# Altium PCB PCB1.PcbDoc
Units mil, origin at the board's own origin, x right, y up, seen from the top; angles counter-clockwise.
Board outline 3295 x 4000 mil, 4 copper layers (Top Layer, GND Plane, Power Plane, Bottom Layer), stack 23.756 mil thick; 49 components, 26 nets, 223 pads, 93 vias.
Unrouted connection lines stored in the file: 37.
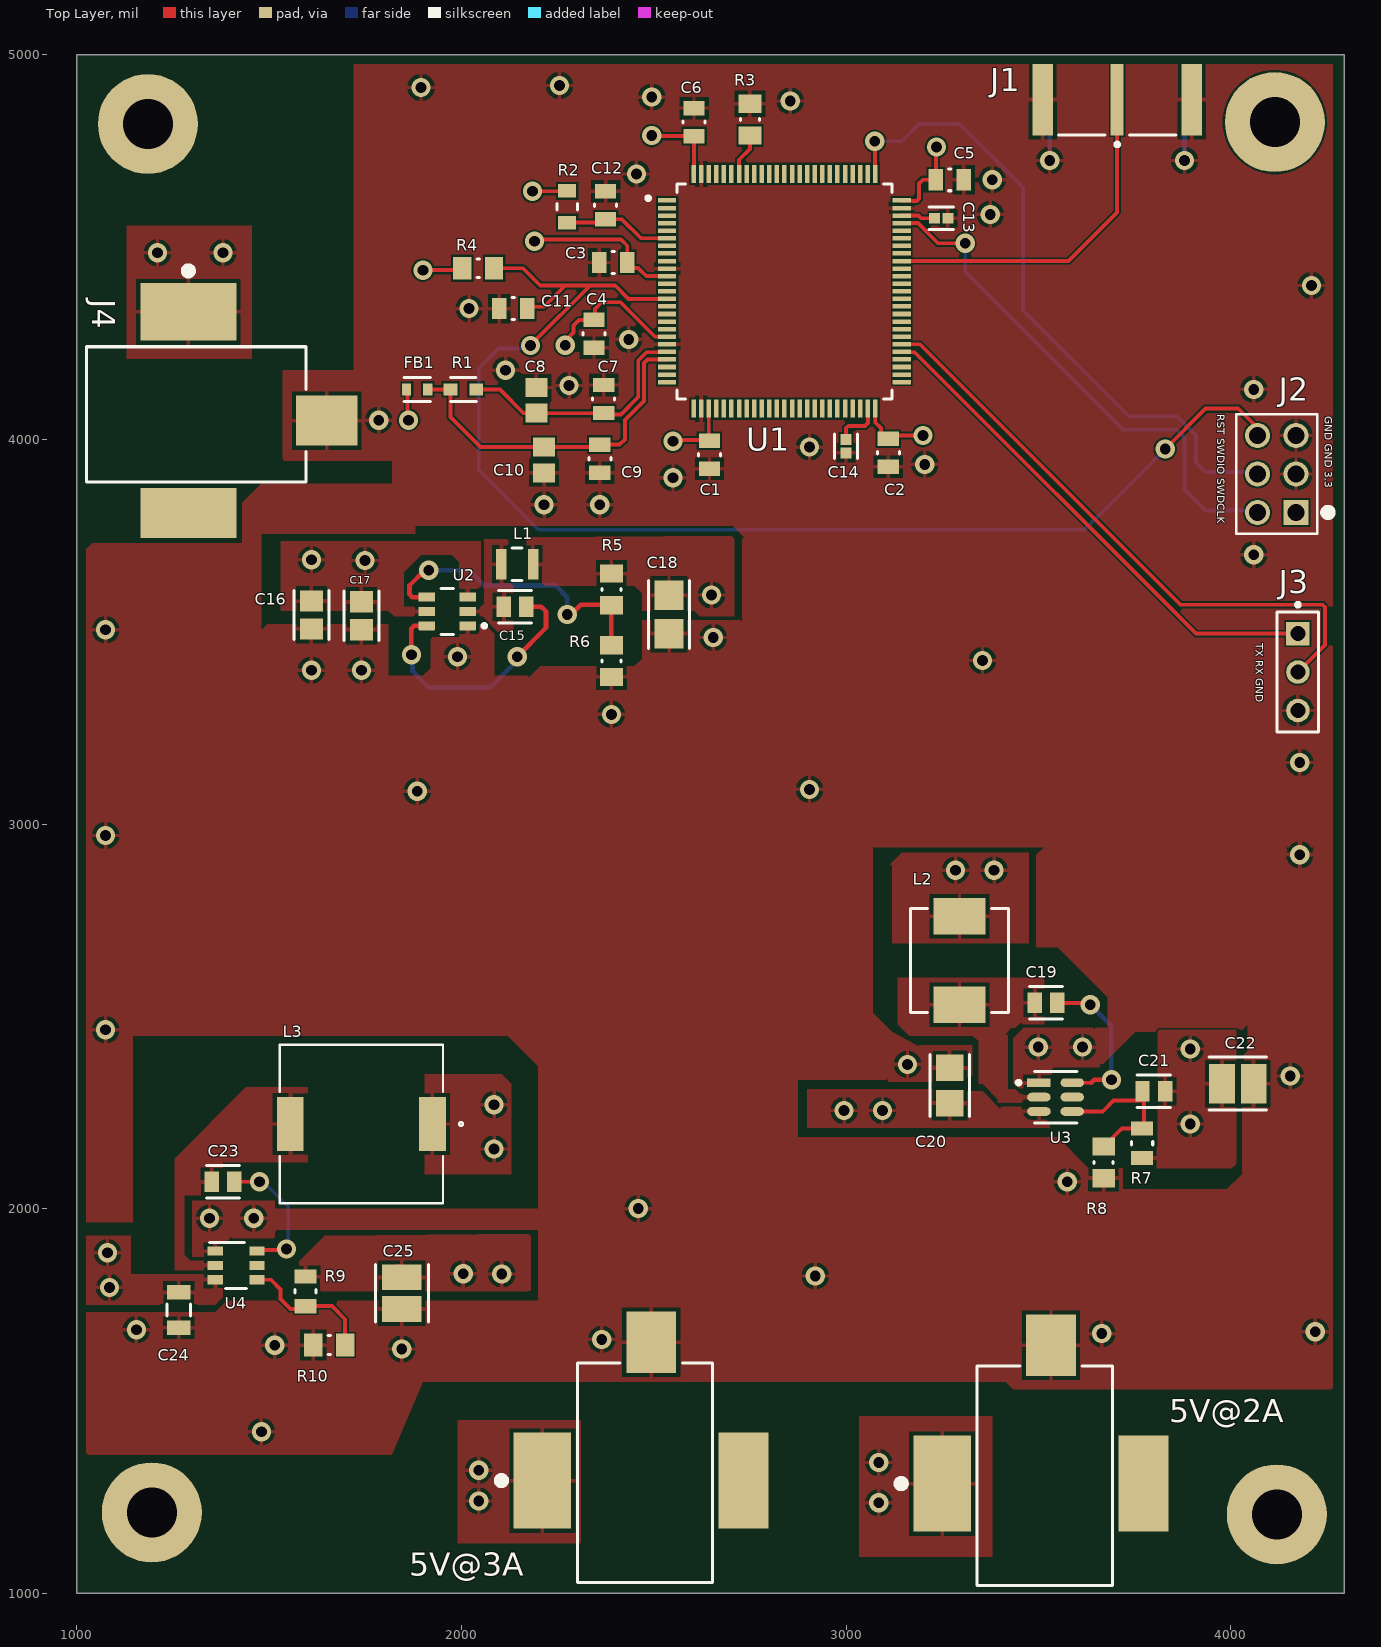
[diagram p0: Top Layer view]
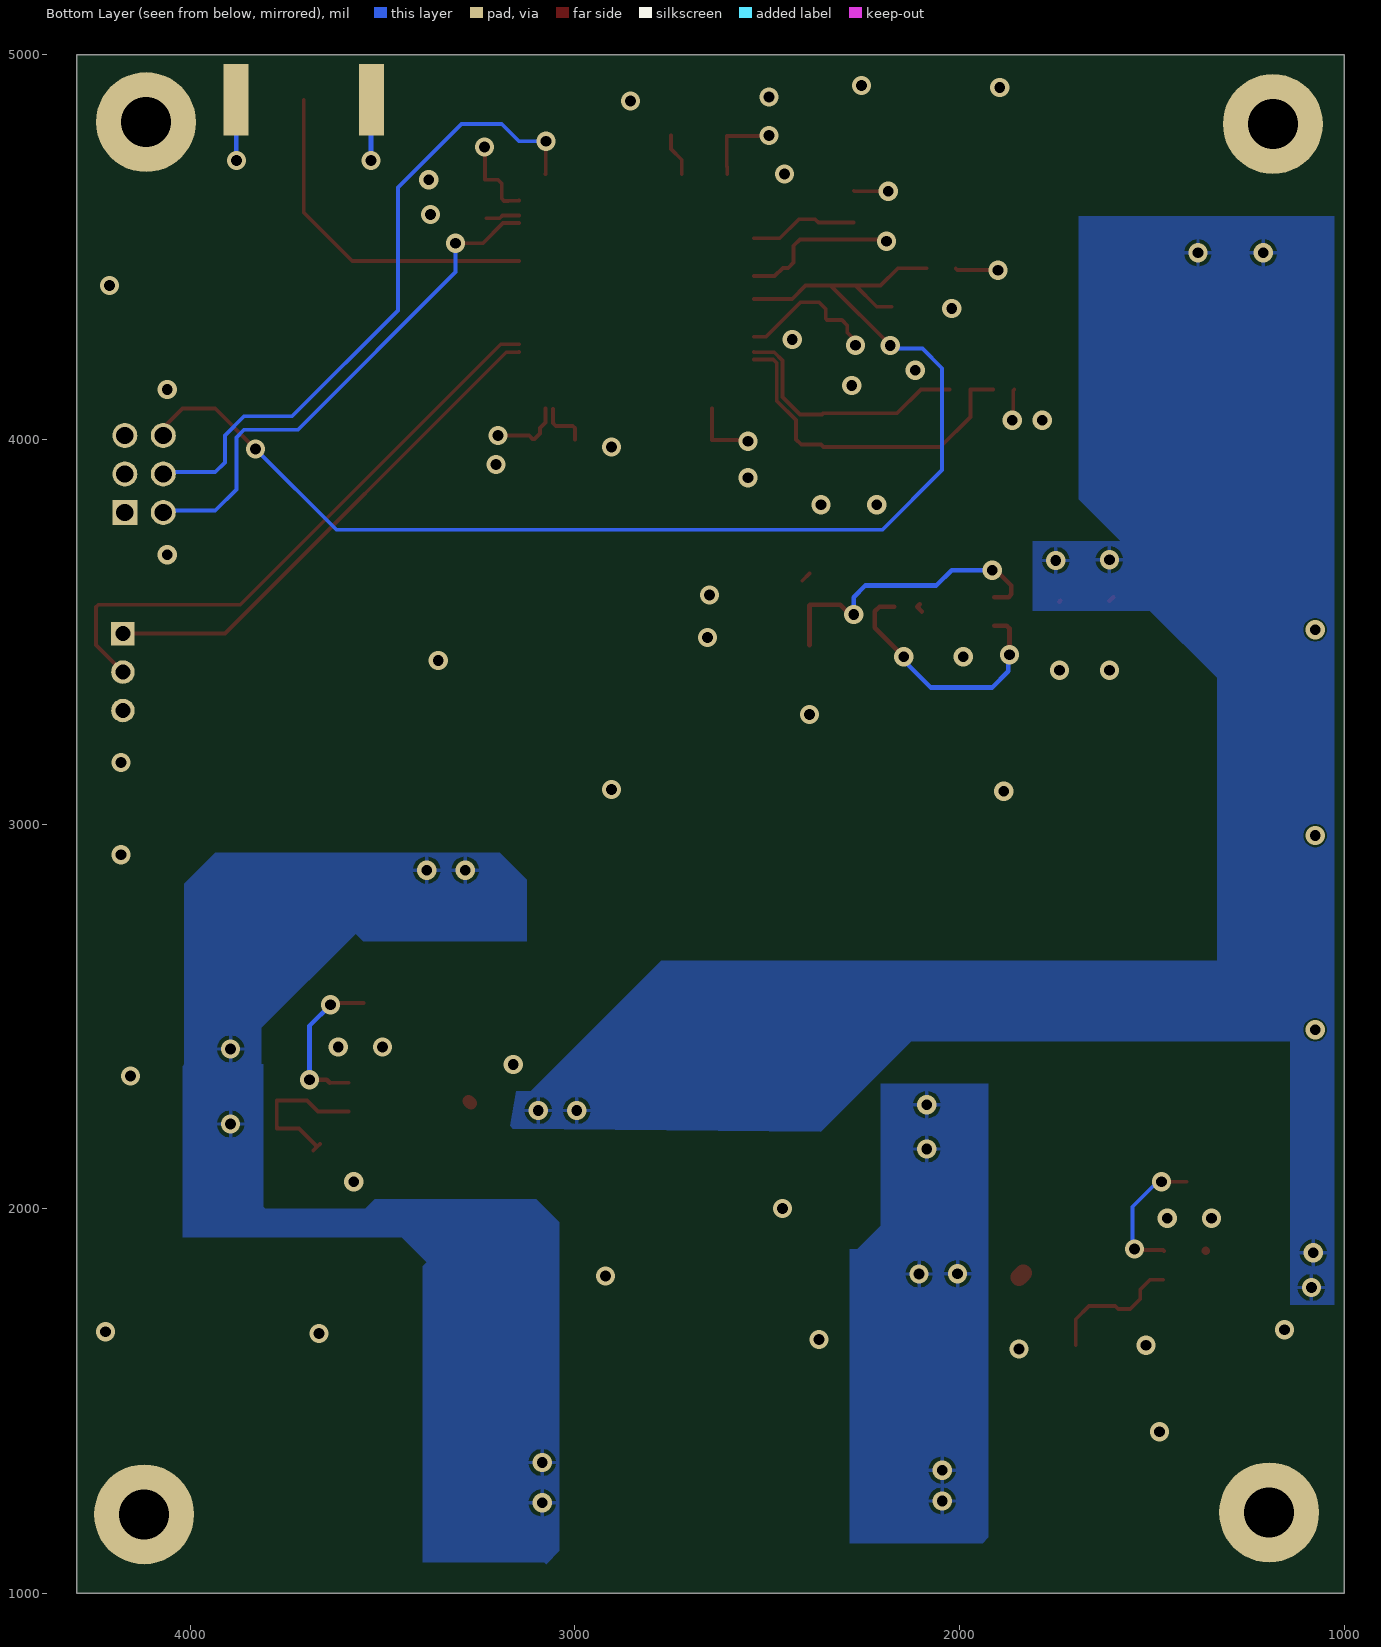
[diagram p1: Bottom Layer view, seen from below]
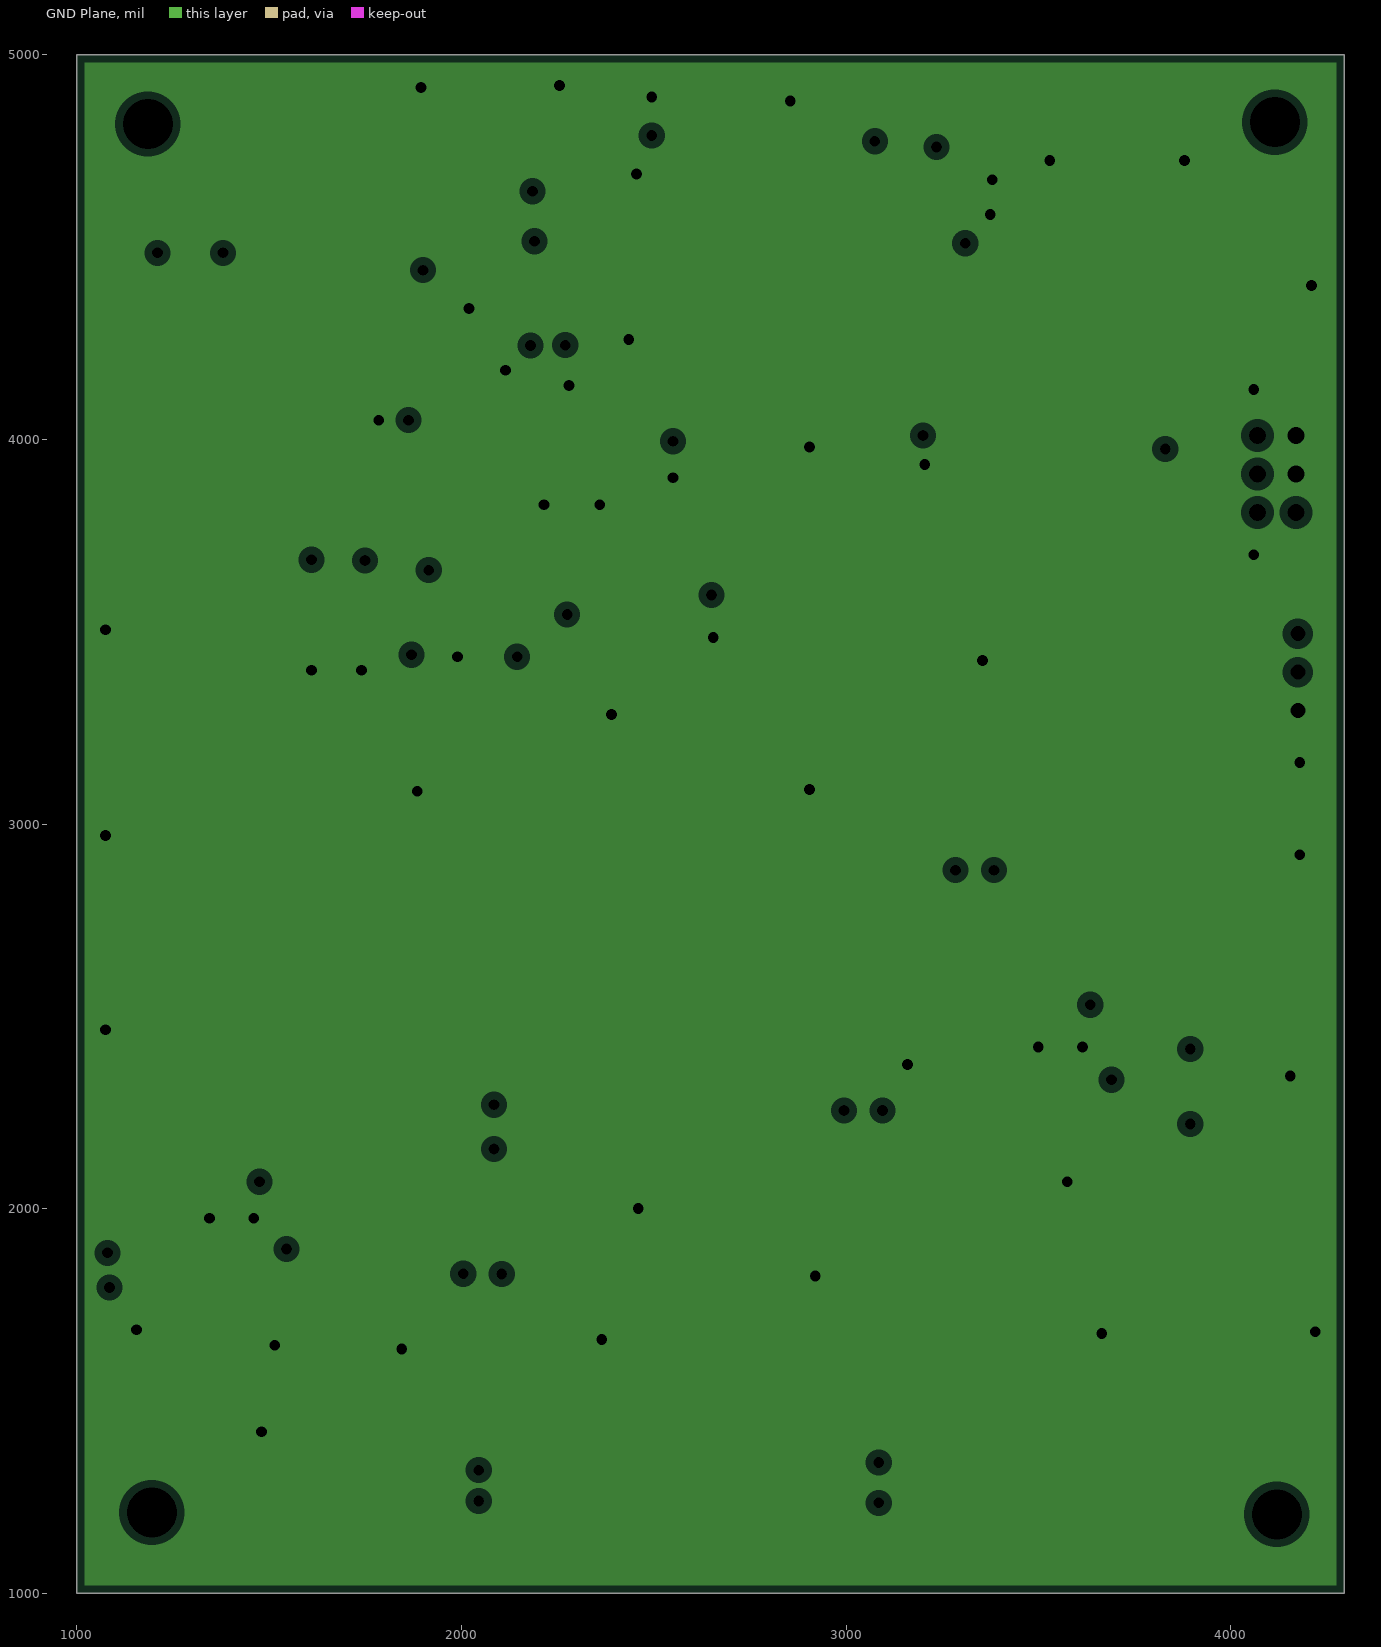
[diagram p2: GND Plane, clearances drawn from the general rule]
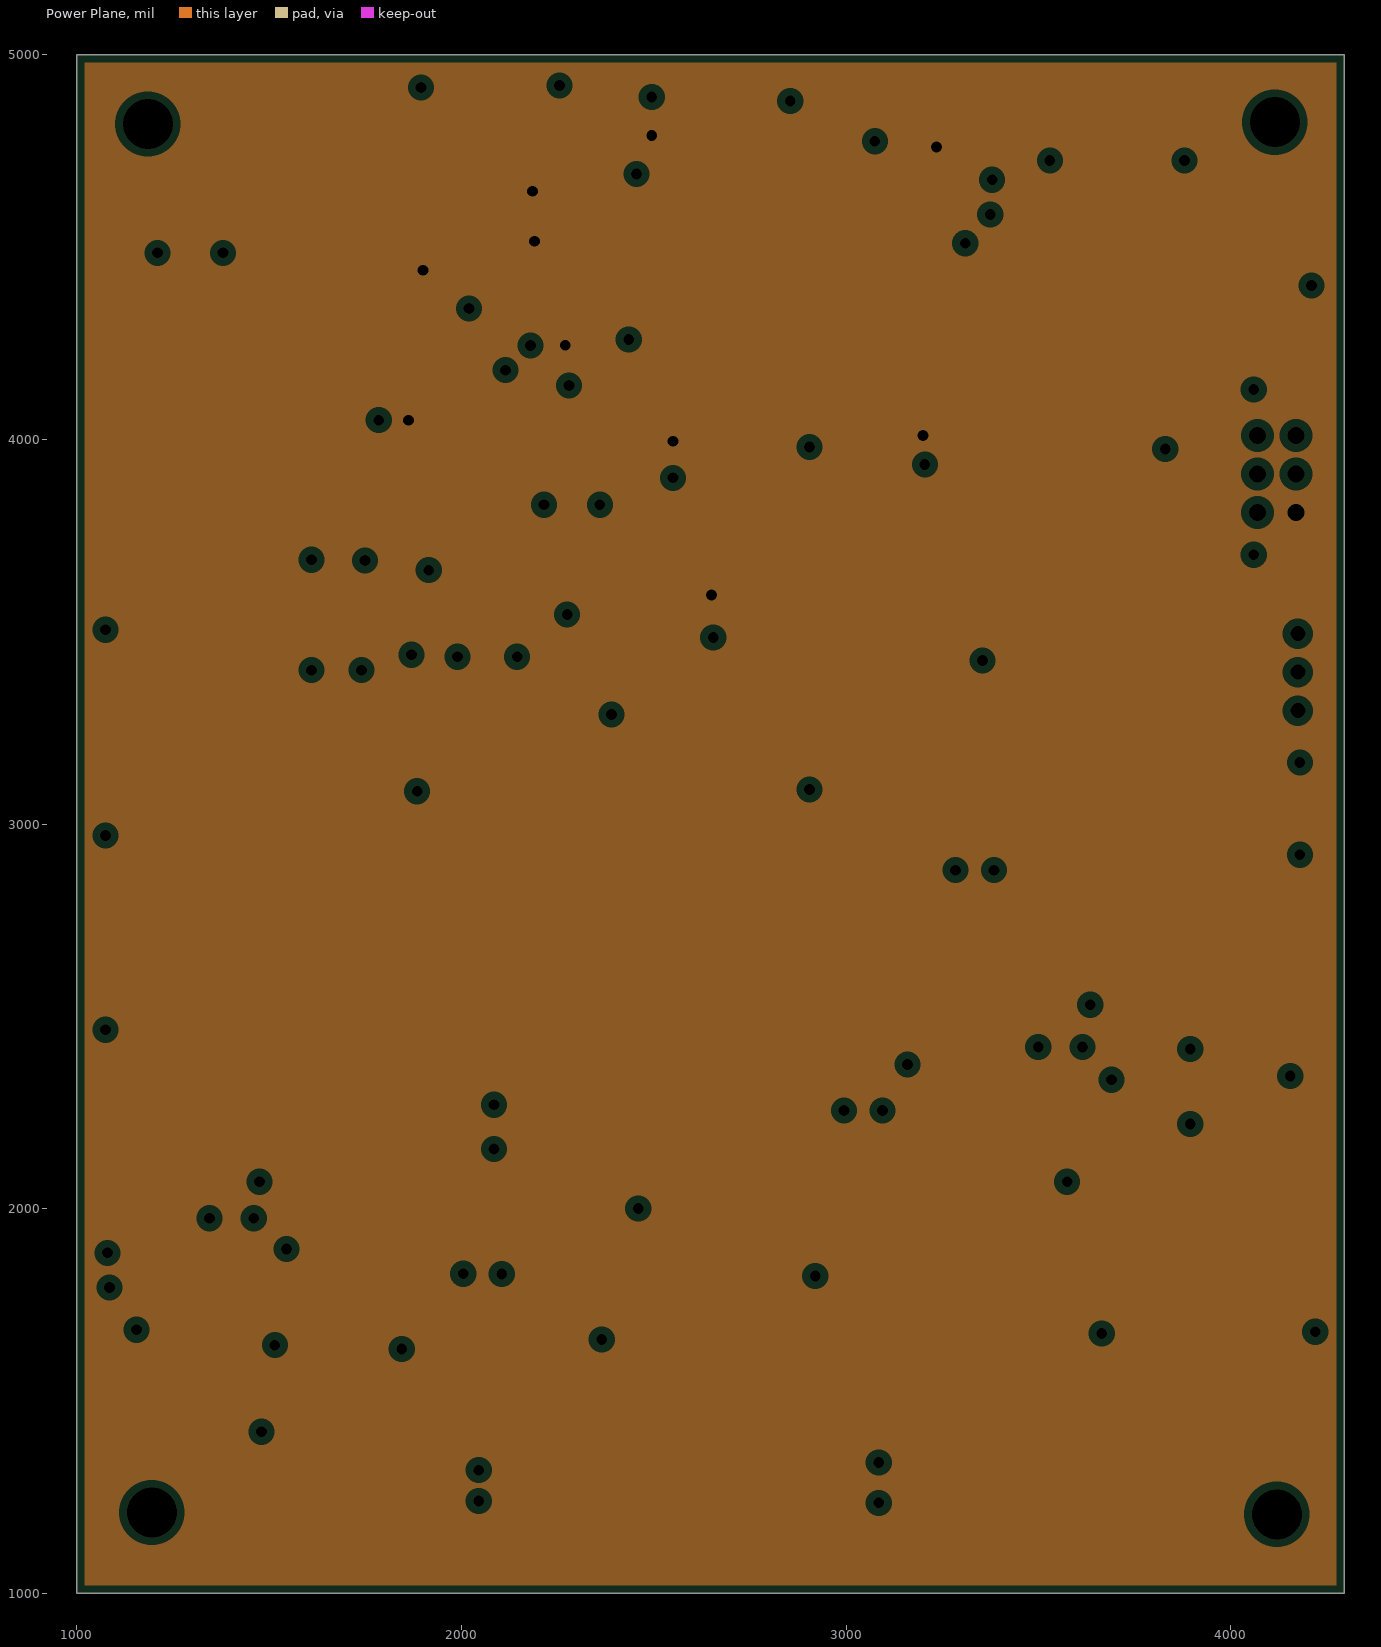
[diagram p3: Power Plane, clearances drawn from the general rule]
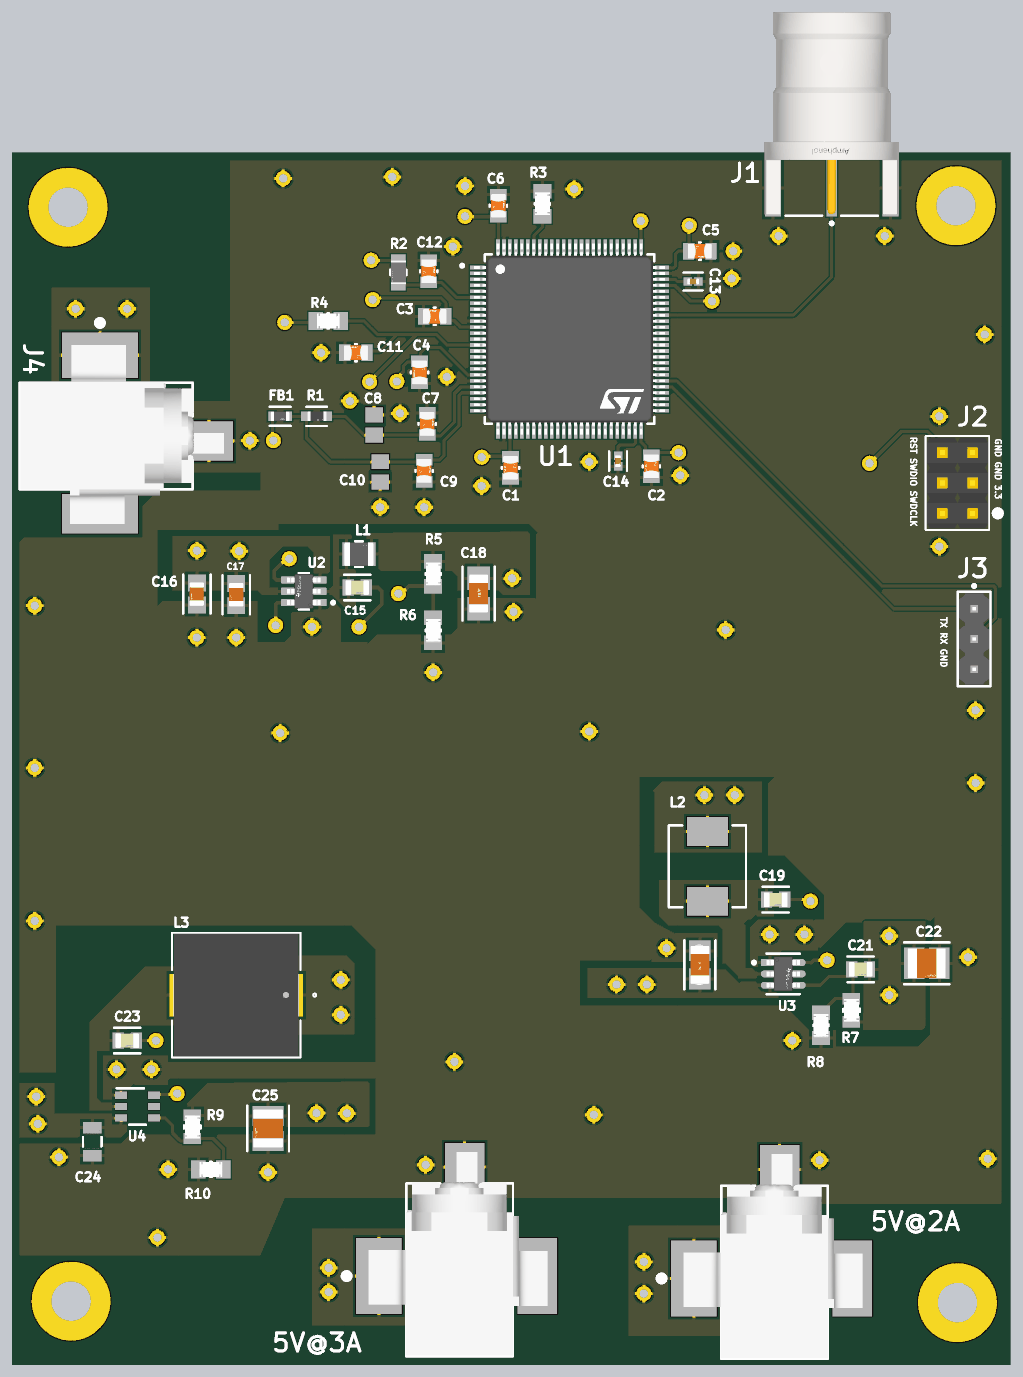
[diagram p4: 3D render of the assembled board from above, using the file's embedded part models]

## Layer stack, top to bottom
Top Solder: solder mask 0.4, Solder Resist, Dk 3.5
Top Layer: signal copper 1.4
Dielectric 2: prepreg 2.8, PP-006, Dk 4.1
GND Plane: plane copper 1.378, net GND
Dielectric 1: dielectric 12.6, FR-4, Dk 4.8
Power Plane: plane copper 1.378, net 3.3V
Dielectric 3: prepreg 2.8, PP-006, Dk 4.1
Bottom Layer: signal copper 1.4
Bottom Solder: solder mask 0.4, Solder Resist, Dk 3.5

## Board outline
1000,1000 4295,1000 4295,5000 1000,5000

## Design rules (kind name [scope] priority, off if disabled: settings)
Clearance [All] p1: gap=5 ignorepadtopadclearanceinfootprint=FALSE
HoleSize [All] p1: absolutevalues=TRUE maxlimit=150 minlimit=1 maxpercent=80.000 minpercent=20.000
MinimumSolderMaskSliver [All] p1: minsoldermaskwidth=5
PlaneClearance [All] p1: clearance=20
PlaneConnect [All] p1: planeconnectstyle=Relief reliefexpansion=20 reliefentries=4 reliefconductorwidth=10 reliefairgap=10
PolygonConnect PolygonConnect_1 [All] p1: connectstyle=Relief reliefconductorwidth=10 reliefentries=4 polygonreliefangle="90 Angle" airgapwidth=10
PolygonConnect [IsPad AND InComponent('L3') vs InNet('NetC23_2')] p2: connectstyle=Direct reliefconductorwidth=10 reliefentries=4 polygonreliefangle="90 Angle" airgapwidth=10
RoutingVias [All] p1: holewidth=28 width=50 viastyle="Through Hole" minholewidth=28 minwidth=50 maxholewidth=28 maxwidth=50
SilkToSolderMaskClearance [IsPad] p1: minsilkscreentomaskgap=6.5 clearancetoexposedcopper=TRUE
SolderMaskExpansion [All] p1: expansion=4 istentingtop=FALSE
SupplyNets "Schematic Supply Nets_1" [InNet('GND')] p1: voltage=0.000
Width [All] p1: maxlimit=50 minlimit=10 preferedwidth=32 bottomlayer_maxwidth=40 minimp=50.000000 maximp=50.000000 favimp=50.000000
25 further rules are at their usual default settings.

## Components (designator, comment, footprint, x,y, rotation, side; value= is the part's Value field where it differs from the comment)
5V@2A "RASM722X" SWIT-RASM722X_V 3511.61,1464.92 r0 top (schematic designator J5)
5V@3A "RASM722X" SWIT-RASM722X_V 2472.21,1472.75 r0 top (schematic designator J6)
C1 "CC0805KRX7R9BB104" FP-CC0805-0_85-MFG 2645,3960 r270 top value="100 nF"
C2 "CC0805KRX7R9BB104" FP-CC0805-0_85-MFG 3110,3965 r270 top value="100 nF"
C3 "CC0805KRX7R9BB104" FP-CC0805-0_85-MFG 2395,4460 r180 top value="100 nF"
C4 "CC0805KRX7R9BB104" FP-CC0805-0_85-MFG 2345,4275 r270 top value="100 nF"
C5 "CC0805KRX7R9BB104" FP-CC0805-0_85-MFG 3270,4675 r0 top value="100 nF"
C6 "CC0805KRX7R9BB104" FP-CC0805-0_85-MFG 2605,4825 r90 top value="100 nF"
C7 "100nF" FP-CC0805-0_85-MFG 2370,4105 r90 top value="100 nF"
C8 "1uF" CAPC2013X140X45NL15T25 2195,4101.54 r90 top
C9 "100nF" FP-CC0805-0_85-MFG 2360,3950 r90 top value="100 nF"
C10 "1uF" CAPC2013X140X45NL15T25 2215,3946.54 r90 top
C11 "CC0805KRX7R9BB104" FP-CC0805-0_85-MFG 2135,4340 r180 top value="100 nF"
C12 "1uF" FP-CC0805-0_85-MFG 2375,4608.58 r90 top value="1 uF"
C13 "2.2uF" FP-GRM155-0_2-IPC_B 3247.72,4575 r0 top
C14 "2.2uF" FP-GRM155-0_2-IPC_B 3000,3982.28 r270 top
C15 "C0805C104M5RACTU" FP-C0805C-DN-MFG 2139.53,3565 r180 top value="0.10 μF"
C16 "GRM21BR61E106MA73L" FP-GRM21B-0_15-IPC_A 1610,3543.53 r270 top
C17 "GRM21BR61E106MA73L" FP-GRM21B-0_15-IPC_A 1740,3541.47 r270 top
C18 "C3216X7S0J476M160AC" FP-C3216-160-0_2-IPC_A 2540,3545 r270 top
C19 "C0805C104M5RACTU" FP-C0805C-DN-MFG 3520,2535 r180 top value="0.10 μF"
C20 "22 uF" FP-C3216-160-0_2-IPC_B 3270,2320 r90 top
C21 "C0805C680J5GACTU" FP-C0805C-DN-MFG 3800.47,2305 r180 top value="68 pF"
C22 "GRM32ER61C476KE15L" FP-GRM32E-0_3-0_2-IPC_C 4018.64,2325 r0 top
C23 "C0805C104M5RACTU" FP-C0805C-DN-MFG 1380,2070 r180 top value="0.10 μF"
C24 "CGA4J3X5R1C475K125AB" FP-CGA4J-IPC_A 1265,1736.26 r270 top
C25 "GRM32ER61C476KE15L" FP-GRM32E-0_3-0_2-IPC_C 1845,1780 r270 top
FB1 "470" FP-MPZ1608-0_8-MFG 1885,4130 r0 top
J1 "112640" FP-112640-MFG 3705,5130 r180 top
J2 "TSW-103-07-L-D" TSW-103-07-G-D_SAI 4170,3810 r90 top
J3 "PREC003SAAN-RC" FP-PREC003SAAN-RC-MFG 4175,3395 r270 top
J4 "RASM722X" SWIT-RASM722X_V 1470,4070 r270 top
L1 "MLP2520V3R3MT0S1" FP-MLP2520M-MFG 2145,3675 r0 top
L2 "IHLP2525CZER100M01" VISH-IHLP2525C-01_V 3295,2645 r90 top
L3 "10 uH" IND_MSS1048_COC 1740,2220 r180 top
R1 "47" FP-RT0603-MFG 2005,4130 r0 top value=47Ω
R2 "0" FP-AC0805-0_6-MFG 2275,4605 r270 top
R3 "10k" FP-CRCW0805-e3-IPC_A 2750,4831.37 r90 top
R4 "10k" FP-CRCW0805-e3-IPC_A 2043.63,4445 r180 top
R5 "CRCW080533K2FKEA" FP-CRCW0805-e3-IPC_A 2390,3610 r270 top
R6 "CRCW080510K0FKEA" FP-CRCW0805-e3-IPC_A 2390,3423.63 r270 top
R7 "CRCW0805100KFKEA" FP-CRCW0805-e3-MFG 3770,2170 r90 top
R8 "CRCW080513K7FKEA" FP-CRCW0805-e3-IPC_A 3670,2120 r270 top
R9 "CRCW0805100KFKEA" FP-CRCW0805-e3-MFG 1595,1785 r90 top
R10 "CRCW080513K7FKEA" FP-CRCW0805-e3-IPC_A 1656.37,1645 r0 top
U1 "STM32F407VGT6" FP-LQFP100-1L-MFG 2840,4385 r0 top
U2 "TPS561208DDCT" FP-DDC0006A-MFG 1963.15,3552.6 r180 top
U3 "TPS54202DDCR" FP-DDC0006A-IPC_B 3545,2290 r0 top
U4 "TPS54308DDCR" DDC0006A_N 1414.13,1852.4 r0 top

## Footprints (in the part's own frame and the unit in brackets; to place one, negate y for a bottom-side part, rotate by r counter-clockwise, add the part's x,y. Pads: shape width x height; smd on the part's side, far side on the other; paste and mask are expansions set on the pad)
CAPC2013X140X45NL15T25 [mm] "Chip Capacitor, 2-Leads, Body 2.00x1.25mm, IPC Medium Density"
  rect 1.25x1.45 smd: 1(-0.85,0) 2(0.85,0)
  body extent -1.08,-0.7 1.07,0.7, height 1.4
DDC0006A_N [mm]
  rect 1x0.6 smd paste+0 mask+0.051: 1(-1.375,0.95) 2(-1.375,0) 3(-1.375,-0.95) 4(1.375,-0.95) 5(1.375,0) 6(1.375,0.95)
  silkscreen extent -1.75,-1.52 0.7,1.53
FP-112640-MFG [mm]
  rect 0.86x4.72 smd paste+0 mask+0: 1(0,6.275)
  rect 1.35x4.72 smd paste+0 mask+0: 2(-4.925,6.275) 3(4.925,6.275)
  rect 1.67x4.72 smd far side paste+0 mask+0: 4(-4.475,6.275) 5(4.475,6.275)
  silkscreen extent -3.88,8.58 3.88,9.35, body extent -5.7,-8.68 5.7,8.73, height 0.25
FP-AC0805-0_6-MFG [mm]
  rect 0.9x1.2 smd paste+0 mask+0: 1(-1.05,0) 2(1.05,0)
  silkscreen extent -0.23,-0.67 0.23,0.67, body extent -1.6,-0.77 1.6,0.77, height 0.25
FP-C0805C-DN-MFG [mm]
  rect 0.95x1.35 smd paste+0 mask+0: 1(-0.75,0) 2(0.75,0)
  silkscreen extent -1.1,-1.07 1.1,1.07, body extent -1.4,-0.85 1.4,0.85, height 0.25
FP-C3216-160-0_2-IPC_A [mil]
  rect 76.93x75.05 smd paste+0 mask+0: 1(-50.24,0) 2(50.24,0)
  silkscreen extent -89,-53 89,53, body extent -108,-57 108,57, height 10
FP-C3216-160-0_2-IPC_B [mil]
  rect 69.05x71.11 smd paste+0 mask+0: 1(-46.3,0) 2(46.3,0)
  silkscreen extent -81,-51 81,51, body extent -91,-45 91,45, height 10
FP-CC0805-0_85-MFG [mm]
  rect 0.95x1.4 smd paste+0 mask+0: 1(-0.925,0) 2(0.925,0)
  silkscreen extent -0.08,-0.72 0.08,0.72, body extent -1.6,-1.05 1.6,1.05, height 0.25
FP-CGA4J-IPC_A [mm]
  rect 0.956x1.556 smd paste+0 mask+0: 1(-1.175,0) 2(1.175,0)
  silkscreen extent -0.4,-0.78 0.4,0.78, body extent -2.15,-1.28 2.15,1.28, height 0.25
FP-CRCW0805-e3-IPC_A [mil]
  rect 47.5x59.38 smd paste+0 mask+0: 1(-41.37,0) 2(41.37,0)
  silkscreen extent -3,-25 3,25, body extent -85,-49 85,49, height 10
FP-CRCW0805-e3-MFG [mm]
  rect 0.95x1.45 smd paste+0 mask+0: 1(-0.975,0) 2(0.975,0)
  silkscreen extent -0.13,-0.7 0.13,0.7, body extent -1.55,-0.82 1.55,0.82, height 0.25
FP-DDC0006A-IPC_B [mm]
  rect 1.554x0.572 smd paste+0 mask+0: 1(-1.1,0.95)
  rrect100% 1.554x0.572 smd paste+0 mask+0: 2(-1.1,0) 3(-1.1,-0.95) 4(1.1,-0.95) 5(1.1,0) 6(1.1,0.95)
  silkscreen extent -2.57,-1.7 1.4,1.7, body extent -2.13,-1.7 2.13,1.7, height 0.25
FP-DDC0006A-MFG [mm]
  rrect17% 1.1x0.6 smd paste+0 mask+0: 1(-1.35,0.95) 2(-1.35,0) 3(-1.35,-0.95) 4(1.35,-0.95) 5(1.35,0) 6(1.35,0.95)
  silkscreen extent -2.58,-1.53 0.42,1.53, body extent -2,-1.63 2,1.63, height 0.25
FP-GRM21B-0_15-IPC_A [mil]
  rect 55.34x59.38 smd paste+0 mask+0: 1(-36.47,0) 2(36.47,0)
  silkscreen extent -64,-45 64,45, body extent -84,-49 84,49, height 10
FP-GRM32E-0_3-0_2-IPC_C [mil]
  rect 67.04x102.61 smd paste+0 mask+0: 1(-41.36,0) 2(41.36,0)
  silkscreen extent -75,-69 75,69, body extent -79,-57 79,57, height 10
FP-GRM155-0_2-IPC_B [mil]
  rect 28.67x27.8 smd paste+0 mask+0: 1(-17.28,0) 2(17.28,0)
  silkscreen extent -32,-30 32,30, body extent -38,-20 38,20, height 10
FP-LQFP100-1L-MFG [mm]
  rect 1.2x0.3 smd paste+0 mask+0: 1(-7.75,6) 2(-7.75,5.5) 3(-7.75,5) 4(-7.75,4.5) 5(-7.75,4) 6(-7.75,3.5) 7(-7.75,3) 8(-7.75,2.5) 9(-7.75,2) 10(-7.75,1.5) 11(-7.75,1) 12(-7.75,0.5) 13(-7.75,0) 14(-7.75,-0.5) 15(-7.75,-1) 16(-7.75,-1.5) 17(-7.75,-2) 18(-7.75,-2.5) 19(-7.75,-3) 20(-7.75,-3.5) 21(-7.75,-4) 22(-7.75,-4.5) 23(-7.75,-5) 24(-7.75,-5.5) 25(-7.75,-6) 51(7.75,-6) 52(7.75,-5.5) 53(7.75,-5) 54(7.75,-4.5) 55(7.75,-4) 56(7.75,-3.5) 57(7.75,-3) 58(7.75,-2.5) 59(7.75,-2) 60(7.75,-1.5) 61(7.75,-1) 62(7.75,-0.5) 63(7.75,0) 64(7.75,0.5) 65(7.75,1) 66(7.75,1.5) 67(7.75,2) 68(7.75,2.5) 69(7.75,3) 70(7.75,3.5) 71(7.75,4) 72(7.75,4.5) 73(7.75,5) 74(7.75,5.5) 75(7.75,6)
  rect 0.3x1.2 smd paste+0 mask+0: 26(-6,-7.75) 27(-5.5,-7.75) 28(-5,-7.75) 29(-4.5,-7.75) 30(-4,-7.75) 31(-3.5,-7.75) 32(-3,-7.75) 33(-2.5,-7.75) 34(-2,-7.75) 35(-1.5,-7.75) 36(-1,-7.75) 37(-0.5,-7.75) 38(0,-7.75) 39(0.5,-7.75) 40(1,-7.75) 41(1.5,-7.75) 42(2,-7.75) 43(2.5,-7.75) 44(3,-7.75) 45(3.5,-7.75) 46(4,-7.75) 47(4.5,-7.75) 48(5,-7.75) 49(5.5,-7.75) 50(6,-7.75) 76(6,7.75) 77(5.5,7.75) 78(5,7.75) 79(4.5,7.75) 80(4,7.75) 81(3.5,7.75) 82(3,7.75) 83(2.5,7.75) 84(2,7.75) 85(1.5,7.75) 86(1,7.75) 87(0.5,7.75) 88(0,7.75) 89(-0.5,7.75) 90(-1,7.75) 91(-1.5,7.75) 92(-2,7.75) 93(-2.5,7.75) 94(-3,7.75) 95(-3.5,7.75) 96(-4,7.75) 97(-4.5,7.75) 98(-5,7.75) 99(-5.5,7.75) 100(-6,7.75)
  silkscreen extent -9.12,-7.1 7.1,7.1, body extent -8.45,-8.45 8.45,8.45, height 0.25
FP-MLP2520M-MFG [mm]
  rect 0.7x2 smd paste+0 mask+0: 1(-1.05,0) 2(1.05,0)
  silkscreen extent -0.33,-1.07 0.33,1.07, body extent -1.5,-1.17 1.5,1.17, height 0.25
FP-MPZ1608-0_8-MFG [mm]
  rect 0.6x0.8 smd paste+0 mask+0: 1(-0.7,0) 2(0.7,0)
  silkscreen extent -0.87,-0.8 0.87,0.8, body extent -1.1,-0.58 1.1,0.58, height 0.25
FP-PREC003SAAN-RC-MFG [mm]
  rect 1.55x1.55 hole 1 paste-2539.97 mask+0: 1(-2.54,0)
  round 1.55 hole 1 paste-2539.97 mask+0: 2(0,0) 3(2.54,0)
  silkscreen extent -4.57,-1.37 3.96,1.37, body extent -4.06,-1.47 4.06,1.47, height 0.25
FP-RT0603-MFG [mm]
  rect 0.9x0.8 smd paste+0 mask+0: 1(-0.85,0) 2(0.85,0)
  silkscreen extent -0.85,-0.81 0.86,0.8, body extent -1.4,-0.55 1.4,0.55, height 0.25
IND_MSS1048_COC [mil]
  rect 70x140 smd paste-35 mask+0: 1(-185,0) 2(185,0)
  silkscreen extent -264,-206 212,206, body extent -207,-201 207,201, height 201
SWIT-RASM722X_V [mm] "SMD, 3-Leads, Body 14.5x9mm"
  rect 3.81x6.35 smd: 1(-6.645,-4.57)
  rect 3.3x4.06 smd: 2(0.545,4.57)
  rect 3.3x6.35 smd: 3(6.645,-4.57)
  silkscreen extent -9.6,-11.3 4.59,3.2, body extent -7.5,-11.23 7.5,5.84, height 11.1
TSW-103-07-G-D_SAI [mil]
  rect 65x65 / inner round 60 / far side rect 65x65 hole 45 paste-99999 mask+0: 1(0,0)
  round 65 / inner round 60 / far side round 65 hole 45 paste-99999 mask+0: 2(0,100) 3(100,0) 4(100,100) 5(200,0) 6(200,100)
  silkscreen extent -55,-93 255,155, body extent -50,-50 250,150, height 330
VISH-IHLP2525C-01_V [mil] "SMD, 2-Leads"
  rect 95x135 smd: 1(-115,0) 2(115,0)
  silkscreen extent -135,-127 135,127

## Part data
5V@2A 5V@3A J4: library part CMP-1772-00002-1, "Power Jack, 5 A, 250 V, 3-Pin SMD, RoHS, Bulk", ComponentLink1Description="Manufacturer URL", ComponentLink1URL=http://www.switchcraft.com/, ComponentLink2Description=Datasheet, ComponentLink2URL=http://www.switchcraft.com/Drawings/rasm732x_cd.pdf, DatasheetVersion="Rev. A, 09/2005", PackageDescription="3-Pin Surface Mount Device, Body 14.5 x 9 mm", PackageReference=RASM722X
C1 C2 C3 C4 C5 C6 C11: library part CMP-2100-03606-3, "CAP CER 0.1UF 50V X7R 0805", Capacitance="100 nF", Manufacturer=Yageo, Package=CC0805-0.85, Temperature="-30°C to +85°C", Temperature Characteristic=X7R, Temperature Range High=+85°C, Temperature Range Low=-30°C, Tolerance=0.1, Voltage Rating="50 V", Automotive=No, Category=Cap, ComponentLink2Description=Datasheet, ComponentLink2URL=http://www.yageo.com/documents/recent/UPY-GPHC_Y5V_6.3V-to-50V_8.pdf, Device Class L1="Passive Components", Device Class L2=Capacitors, Device Class L3="Ceramic Capacitors", Digikey Description="CAP CER 0.1UF 50V X7R 0805", Footprint Url=http://www.yageo.com/exep/pages/download/literatures/UPY-C_GEN_24.pdf, Height=0.95mm, Ipc Land Pattern Name=CAPC200125X85, Lead Free=Yes, Manufacturer Part Number=CC0805KRX7R9BB104, Material=Ceramic, Mouser Description="Multilayer Ceramic Capacitors MLCC - SMD/SMT 100nF 50V X7R 10%", Octopart=https://octopart.com/cc0805krx7r9bb104-yageo-192993, RoHS=TRUE
C7: library part CMP-2100-03606-3, "CAP CER 0.1UF 50V X7R 0805 /  / CC0805KRX7R9BB104", Capacitance="100 nF", Manufacturer=Yageo, Manufacturer Part Number=CC0805KRX7R9BB104, Package=CC0805-0.85, Temperature="-30°C to +85°C", Temperature Characteristic=X7R, Temperature Range High=+85°C, Temperature Range Low=-30°C, Tolerance=0.1, Voltage Rating="50 V", Automotive=No, Category=Cap, ComponentLink2Description=Datasheet, ComponentLink2URL=http://www.yageo.com/documents/recent/UPY-GPHC_Y5V_6.3V-to-50V_8.pdf, Device Class L1="Passive Components", Device Class L2=Capacitors, Device Class L3="Ceramic Capacitors", Digikey Description="CAP CER 0.1UF 50V X7R 0805", Footprint Url=http://www.yageo.com/exep/pages/download/literatures/UPY-C_GEN_24.pdf, Height=0.95mm, Ipc Land Pattern Name=CAPC200125X85, Lead Free=Yes, Material=Ceramic, Mouser Description="Multilayer Ceramic Capacitors MLCC - SMD/SMT 100nF 50V X7R 10%", Octopart=https://octopart.com/cc0805krx7r9bb104-yageo-192993, RoHS=TRUE
C8 C10: library part CMP-2007-03403-1, "GRM21BR71E105KA99L", Manufacturer=Murata, Part Number=GRM21BR71E105KA99L
C9: library part CMP-2100-03606-3, "CAP CER 0.1UF 50V X7R 0805 / CC0805KRX7R9BB104", Capacitance="100 nF", Manufacturer=Yageo, Manufacturer Part Number=CC0805KRX7R9BB104, Package=CC0805-0.85, Temperature="-30°C to +85°C", Temperature Characteristic=X7R, Temperature Range High=+85°C, Temperature Range Low=-30°C, Tolerance=0.1, Voltage Rating="50 V", Automotive=No, Category=Cap, ComponentLink2Description=Datasheet, ComponentLink2URL=http://www.yageo.com/documents/recent/UPY-GPHC_Y5V_6.3V-to-50V_8.pdf, Device Class L1="Passive Components", Device Class L2=Capacitors, Device Class L3="Ceramic Capacitors", Digikey Description="CAP CER 0.1UF 50V X7R 0805", Footprint Url=http://www.yageo.com/exep/pages/download/literatures/UPY-C_GEN_24.pdf, Height=0.95mm, Ipc Land Pattern Name=CAPC200125X85, Lead Free=Yes, Material=Ceramic, Mouser Description="Multilayer Ceramic Capacitors MLCC - SMD/SMT 100nF 50V X7R 10%", Octopart=https://octopart.com/cc0805krx7r9bb104-yageo-192993, RoHS=TRUE
C12: library part CMP-2100-03605-2, "CAP CER 1UF 25V X7R 0805 /  / CC0805KKX7R8BB105", Capacitance="1 uF", Manufacturer=Yageo, Manufacturer Part Number=CC0805KKX7R8BB105, Package=CC0805-0.85, Temperature="-30°C to +85°C", Temperature Characteristic=X7R, Temperature Range High=+85°C, Temperature Range Low=-30°C, Tolerance=0.1, Voltage Rating="25 V", Automotive=No, Category=Cap, ComponentLink2Description=Datasheet, ComponentLink2URL=http://www.yageo.com/documents/recent/UPY-GPHC_Y5V_6.3V-to-50V_8.pdf, Device Class L1="Passive Components", Device Class L2=Capacitors, Device Class L3="Ceramic Capacitors", Digikey Description="CAP CER 1UF 25V X7R 0805", Footprint Url=http://www.yageo.com/exep/pages/download/literatures/UPY-C_GEN_24.pdf, Height=0.95mm, Ipc Land Pattern Name=CAPC200125X85, Lead Free=Yes, Material=Ceramic, Mouser Description="Multilayer Ceramic Capacitor, CC Series, 1 - F, - 10%, X7R, 25 V, 0805 [2012 Metric]", Octopart=https://octopart.com/cc0805kkx7r8bb105-yageo-42244645, RoHS=TRUE
C13 C14: library part CMP-06035-001793-1, "Chip Multilayer Ceramic Capacitors for General Purpose, 0402, 2.2uF, X5R, 15%, 10%, 16V /  / GRM155R61C225KE11D", Case Code (Imperial)=0402, Case Code (Metric)=1005, Max Operating Temperature=85°C, Min Operating Temperature=-55°C, Tolerance=10%, Voltage Rating=16V, Capacitance=2.2uF, Case/Package=0402, Height=0.3mm, Lead Free="Lead Free", Length=0.039inch, Material=Ceramic, Mount="Surface Mount", Packaging="Tape and Reel", Thickness=0.022inch, Voltage Rating (DC)=16V, Width=0.02inch
C15 C19 C23: library part CMP-1036-04423-3, "CAP CER 0.1UF 50V X7R 0805", Capacitance="0.10 μF", Manufacturer=KEMET, Package=C0805C-DN, Temperature="-55°C to +125°C", Temperature Characteristic=X7R, Temperature Coefficient=30ppm/°C, Temperature Range High=+125°C, Temperature Range Low=-55°C, Tolerance=0.2, Voltage Rating="50 V", Automotive=No, Category=Cap, ComponentLink2Description=Datasheet, ComponentLink2URL=https://content.kemet.com/datasheets/KEM_C1003_C0G_SMD.pdf, Device Class L1="Passive Components", Device Class L2=Capacitors, Device Class L3="Ceramic Capacitors", Digikey Description="CAP CER 0.1UF 50V X7R 0805", Height=0.88mm, Ipc Land Pattern Name=CAPC200125X78, Lead Free=Yes, Manufacturer Part Number=C0805C104M5RACTU, Material=Ceramic, Mouser Description="Multilayer Ceramic Capacitors MLCC - SMD/SMT 50volts 0.1uF X7R 20%", Octopart=https://octopart.com/c0805c104m5ractu-kemet-129379, RoHS=TRUE
C16 C17: library part CMP-06035-013048-1, "Chip Multilayer Ceramic Capacitors for General Purpose, 0805, 10uF, X5R, 15%, 20%, 25V", Capacitance=10uF, Case Code (Imperial)=0805, Case Code (Metric)=2012, Dielectric=X5R, Max Operating Temperature=85°C, Min Operating Temperature=-55°C, Package Quantity=3000, Resistor Type=Ceramic, Tolerance=20%, Voltage Rating=25V, Case/Package=0805, Depth=1.25mm, Height=1.25mm, Lead Free="Lead Free", Length=2mm, Mount="Surface Mount", Packaging="Tape and Reel", REACH SVHC="No SVHC", Termination=SMD/SMT, Thickness=0.055inch, Voltage Rating (DC)=25V, Weight=0.000335oz, Width=0.049inch
C18: library part CMP-08246-003358-1, "Multilayer Ceramic Capacitors 47uF ±20% 6.3V X7S SMD 1206", Capacitance=47uF, Case Code (Imperial)=1206, Case Code (Metric)=3216, Dielectric=X7S, Dielectric Material=Ceramic, Max Operating Temperature=125°C, Min Operating Temperature=-55°C, Package Quantity=1, Tolerance=20%, Voltage Rating=6.3V, Case/Package=1206, Construction=Flat, Depth=1.6mm, Height=1.6mm, Lead Free="Lead Free", Length=3.2mm, Mount="Surface Mount", Packaging="Tape and Reel", Radiation Hardening=No, REACH SVHC="No SVHC", Resistor Type=Ceramic, Series=C, Termination=SMD/SMT, Thickness=1.6mm, Voltage Rating (DC)=6.3V, Weight=0.000571oz, Width=0.063inch
C20: library part CMP-08246-004117-1, "Multilayer Ceramic Capacitors 22uF ±20% 16V X5R SMD 1206 /  / C3216X5R1C226M160AB", Capacitance=22uF, Case Code (Imperial)=1206, Case Code (Metric)=3216, Dielectric=X5R, Dielectric Material=Ceramic, Max Operating Temperature=85°C, Min Operating Temperature=-55°C, Package Quantity=1, Tolerance=20%, Voltage Rating=16V, Case/Package=1206, Construction=Flat, Depth=1.6mm, Height=1.6mm, Lead Free="Lead Free", Length=3.2mm, Mount="Surface Mount", Packaging="Tape and Reel", Radiation Hardening=No, Resistor Type=Ceramic, RoHS Compliant=Yes, Series=C, Termination=SMD/SMT, Thickness=0.071inch, Voltage Rating (DC)=16V, Weight=0.000571oz, Width=1.6mm
C21: library part CMP-2007-00438-2, "CAP CER 68PF 50V C0G/NP0 0805", Capacitance="68 pF", Manufacturer=KEMET, Package=C0805C-DN, Temperature="-55°C to +125°C", Temperature Characteristic=C0G, Temperature Coefficient=30ppm/°C, Temperature Range High=+125°C, Temperature Range Low=-55°C, Tolerance=0.05, Voltage Rating="50 V", Automotive=No, Category=Cap, ComponentLink2Description=Datasheet, ComponentLink2URL=https://content.kemet.com/datasheets/KEM_C1003_C0G_SMD.pdf, Device Class L1="Passive Components", Device Class L2=Capacitors, Device Class L3="Ceramic Capacitors", Digikey Description="CAP CER 68PF 50V C0G/NP0 0805", Height=0.88mm, Ipc Land Pattern Name=CAPC200125X78, Lead Free=Yes, Manufacturer Part Number=C0805C680J5GACTU, Material=Ceramic, Mouser Description="Multilayer Ceramic Capacitors MLCC - SMD/SMT 50volts 68pF C0G 5%", Octopart=https://octopart.com/c0805c680j5gactu-kemet-130145, RoHS=TRUE
C22 C25: library part CMP-2000-06362-2, "CAP CER 47UF 16V X5R 1210", Capacitance=47uF, Case Code (Imperial)=1210, Case Code (Metric)=3225, Dielectric=X5R, Max Operating Temperature=85°C, Min Operating Temperature=-55°C, Package Quantity=1, Tolerance=10%, Voltage=16V, Case/Package=1210, Depth=2.5mm, Height=2.5mm, Lead Free="Lead Free", Length=3.2mm, Material=Ceramic, Mount="Surface Mount", Number of Pins=2, Packaging="Cut Tape", Radiation Hardening=No, REACH SVHC="No SVHC", RoHS Compliant=Yes, Termination=SMD/SMT, Thickness=0.106inch, Voltage Rating=16V, Voltage Rating (DC)=16V, Width=0.098inch
C24: library part CMP-08246-001922-1, "Cap Ceramic 4.7uF 16V X5R 10% Pad SMD 0805 +85°C Automotive T/R", Capacitance=4.7uF, Case Code (Imperial)=0805, Case Code (Metric)=2012, Dielectric=X5R, Max Operating Temperature=85°C, Min Operating Temperature=-55°C, Package Quantity=2000, Ratings=AEC-Q200, Tolerance=10%, Voltage Rating=16V, Case/Package=0805, Height=1.25mm, Length=0.079inch, Mount="Surface Mount", Packaging="Tape and Reel", Thickness=0.057inch, Voltage Rating (DC)=16V, Weight=0.000194oz, Width=0.049inch
FB1: library part CMP-08257-000411-1, "COMPARE TO FCM 1608KF-471T03 /  / PLACEHOLDER", Case Code (Imperial)=0603, Case Code (Metric)=1608, Current Rating=1A, DC Resistance (DCR)=150mR, Package Quantity=4000, Tolerance=25%, Case/Package=0603, Core Material=Ferrite, Height=0.037inch, Impedance=470R, Length=0.063inch, Max DC Current=1A, Mount="Surface Mount", Packaging="Tape and Reel", RoHS Compliant=Yes, Width=0.031inch
J1: library part CMP-20040-000013-1, "CONN BNC JACK STR 50OHM EDGE MNT", Dielectric Material=PTFE, Frequency=4GHz, Housing Color=Silver, Max Operating Temperature=165°C, Min Operating Temperature=-65°C, Operating Frequency="0 to 4 GHz", Package Quantity=1, Resistance=50R, Voltage Rating=500V, Body Material=Brass, Body Plating=Nickel, Center Contact Plating=Gold, Connector Type=BNC, Contact Material=Bronze, Contact Plating=Gold, Fastening Type=Bayonet, Impedance=50R, Mating Cycles=500, Max Frequency=4GHz, Mount=Edge, Orientation=Straight, Packaging=Bulk, Radiation Hardening=No, RoHS Compliant=Yes, Series=-, Termination=Solder
J2: "Description", Manufacturer_Name="Samtec Inc", Copyright="Copyright (C) 2025 Ultra Librarian. All rights reserved.", Manufacturer_Part_Number=TSW-103-07-L-D, RefDes=RefDes, Type=Type
J3: library part CMP-00595-22265080-1, "PREC003SAAN-RC Conn Header Vert 3POS 2.54MM", Color=Black, Current Rating=3A, Max Operating Temperature=105°C, Min Operating Temperature=-40°C, Connector Type="Male Pin", Contact Material="Nickel, Tin", Contact Mating Length=5.842mm, Contact Plating=Tin, Height=8.74mm, Mount="Through Hole", NexarPartId=22265080, Number of Contacts=3, Number of Positions=3, Number of Rows=1, Packaging=Bulk, Pitch=2.54mm, RoHS=Compliant, Termination=Solder
L1: library part CMP-08253-000080-1, "Shielded Multilayer Inductor 3.3uH ±20% 900mA 260mΩ SMD 1008", Case Code (Imperial)=1008, Case Code (Metric)=2520, Current Rating=900mA, DC Resistance (DCR)=260mR, Inductance=3.3uH, Max Operating Temperature=125°C, Min Operating Temperature=-40°C, Package Quantity=3000, Test Frequency=2MHz, Tolerance=20%, Case/Package=1008, Core Material=Ferrite, Height - Seated (Max)=0.047inch, Length=0.098inch, Mount="Surface Mount", Packaging="Tape and Reel", RoHS Compliant=Yes, Shielding=Shielded, Width=0.079inch
L2: library part CMP-2000-06440-1, "Low-Profile, High Current IHLP(R) Inductor, 10 uH, 5 MHz, -55 to 125 degC, 2-Pin SMD, RoHS, Tape and Reel", Case Height=3mm, Case Length=6.86mm, Case Width=6.47mm, Inductance=10uH, Manufacturer=Vishay, Maximum DC Current=3A, Maximum DC Resistance=105mOhms, Operating Temperature Range=-55Cto+125C, Package / Case=2525(6363metric), Package Description="2-Pin Surface Mount Device", Package Reference=IHLP2525C-01, Self Resonant Frequency=5MHz, Test Frequency=100kHz, Tolerance=20%, Brand=Vishay/Dale, Datasheet URL=http://download.siliconexpert.com/pdfs/2016/3/15/16/5/35/891/vsh_/manual/812046841784326lp25cz01.pdf, Datasheet Version=02/2015, Manufacturer URL=http://www.vishay.com/, Mounting Technology=SurfaceMount, Packaging=Reel, Product=PowerInductors, Product Category=FixedInductors, RoHS=Details, Series=IHLP-2525CZ-01, Shielding=Shielded, Termination Style=SMD/SMT, Type=LowProfileHighCurrentIHLPInductors
L3: library part MSS1048-103MLB, "MSS1048-103MLC", Manufacturer_Name=Coilcraft, Copyright="Copyright (C) 2026 Ultra Librarian. All rights reserved.", Manufacturer_Part_Number=MSS1048-103MLB
R1: library part CMP-03412-001305-1, "RES SMD 47 OHM 0.5% 1/10W 0603 /  / RT0603DRD0747RL", Manufacturer=Yageo, Manufacturer Part Number=RT0603DRD0747RL, Package=RT0603, Power Rating=0.1W, Resistance=47Ω, Temperature="-55°C to +155°C", Temperature Coefficient="25 ppm/°C", Temperature Range High=+155°C, Temperature Range Low=-55°C, Tolerance=0.005, Voltage Rating=75V, Automotive=No, Category=Res, ComponentLink2Description=Datasheet, ComponentLink2URL=http://www.yageo.com/documents/recent/PYu-RT_1-to-0.01_RoHS_L_9.pdf, Composition="Thin Film", Device Class L1="Passive Components", Device Class L2=Resistors, Device Class L3="Chip SMD Resistors", Digikey Description="RES SMD 47 OHM 0.5% 1/10W 0603", Footprint Url=http://www.yageo.com/exep/pages/download/literatures/PYu-R_Mount_10.pdf, Height=0.55mm, Ipc Land Pattern Name=RESC16080X45, Lead Free=Yes, Octopart=https://octopart.com/rt0603drd0747rl-yageo-1226911, RoHS=TRUE, Series=RT
R2: library part CMP-03412-037823-1, "RES SMD 0 OHM JUMPER 1/8W 0805 /  / AC0805JR-070RL", Case Code (Imperial)=0805, Case Code (Metric)=2012, Max Operating Temperature=155°C, Max Power Dissipation=125mW, Min Operating Temperature=-55°C, Resistance=0R, Resistor Type="Thick Film", Temperature Coefficient=200ppm/°C, Tolerance=5%, Voltage Rating=150V, Case/Package=0805, Features="Moisture Resistant", Height=0.024inch, Lead Free="Lead Free", Length=0.079inch, Number of Terminations=2, Packaging="Tape and Reel", Power Rating=125mW, Series=AC, Termination=SMD/SMT, Width=1.25mm
R3 R4: library part CMP-2001-04908-2, "RES Thick Film, 10kΩ, 1%, 0.125W, 100ppm/°C, 0805 /  / CRCW080510K0FKEA", Case Code (Imperial)=0805, Case Code (Metric)=2012, Max Operating Temperature=155°C, Min Operating Temperature=-55°C, Package Quantity=5000, Power Rating=125mW, Resistance=10kR, Temperature Coefficient=100ppm/°C, Tolerance=1%, Voltage Rating=150V, Case/Package=0805, Composition="Thick Film", Contact Plating=Tin, Depth=1.25mm, Height=0.45mm, Lead Free="Lead Free", Length=2mm, Military Standard=Not, Packaging="Tape and Reel", Radiation Hardening=No, Termination=SMD/SMT, Voltage Rating (DC)=150V, Weight=0.000194oz, Width=1.25mm
R5: library part CMP-2001-03829-2, "RES Thick Film, 33.2kΩ, 1%, 0.125W, 100ppm/°C, 0805", Case Code (Imperial)=0805, Case Code (Metric)=2012, Max Operating Temperature=155°C, Max Power Dissipation=125mW, Min Operating Temperature=-55°C, Package Quantity=10, Resistance=33.2kR, Temperature Coefficient=100ppm/°C, Tolerance=1%, Voltage Rating=150V, Case/Package=0805, Composition="Thick Film", Contact Plating=Tin, Depth=1.25mm, Features="Automotive AEC-Q200", Height=0.45mm, Lead Free="Lead Free", Length=2mm, Military Standard=Not, Number of Terminations=2, Packaging="Tape and Reel", Power Rating=125mW, Radiation Hardening=No, Termination=SMD/SMT, Voltage Rating (DC)=150V, Weight=0.000194oz, Width=0.049inch
R6: library part CMP-2001-04908-2, "RES Thick Film, 10kΩ, 1%, 0.125W, 100ppm/°C, 0805", Case Code (Imperial)=0805, Case Code (Metric)=2012, Max Operating Temperature=155°C, Min Operating Temperature=-55°C, Package Quantity=5000, Power Rating=125mW, Resistance=10kR, Temperature Coefficient=100ppm/°C, Tolerance=1%, Voltage Rating=150V, Case/Package=0805, Composition="Thick Film", Contact Plating=Tin, Depth=1.25mm, Height=0.45mm, Lead Free="Lead Free", Length=2mm, Military Standard=Not, Packaging="Tape and Reel", Radiation Hardening=No, Termination=SMD/SMT, Voltage Rating (DC)=150V, Weight=0.000194oz, Width=1.25mm
R7 R9: library part CMP-2001-04899-2, "RES Thick Film, 100kΩ, 1%, 0.125W, 100ppm/°C, 0805", Case Code (Imperial)=0805, Case Code (Metric)=2012, Max Operating Temperature=155°C, Min Operating Temperature=-55°C, Package Quantity=5000, Power Rating=125mW, Resistance=100kR, Temperature Coefficient=100ppm/°C, Tolerance=1%, Voltage Rating=150V, Case/Package=0805, Composition="Thick Film", Contact Plating=Tin, Depth=1.25mm, Height=0.45mm, Lead Free="Lead Free", Length=2mm, Military Standard=Not, Mount="Surface Mount", Number of Pins=2, Packaging="Tape and Reel", Radiation Hardening=No, Termination=SMD/SMT, Voltage Rating (DC)=150V, Weight=0.000194oz, Width=1.25mm
R8 R10: library part CMP-2001-04947-2, "RES Thick Film, 13.7kΩ, 1%, 0.125W, 100ppm/°C, 0805", Case Code (Imperial)=0805, Case Code (Metric)=2012, Max Operating Temperature=155°C, Max Power Dissipation=125mW, Min Operating Temperature=-55°C, Package Quantity=10, Resistance=13.7kR, Temperature Coefficient=100ppm/°C, Tolerance=1%, Voltage Rating=150V, Case/Package=0805, Composition="Thick Film", Contact Plating=Tin, Depth=1.25mm, Features="Automotive AEC-Q200", Height=0.45mm, Lead Free="Lead Free", Length=2mm, Military Standard=Not, Number of Pins=2, Number of Terminations=2, Packaging="Tape and Reel", Power Rating=125mW, Radiation Hardening=No, Termination=SMD/SMT, Voltage Rating (DC)=150V, Weight=0.000194oz, Width=0.049inch
U1: library part CMP-0243-00017-5, Ambient Temperature Range High=85°C, Case/Package=LQFP, Frequency=168MHz, Manufacturer Package Identifier=1L_ME_V5, Max Junction Temperature (Tj)=125°C, Max Supply Voltage=3.6V, Min Operating Temperature=-40°C, Min Supply Voltage=1.8V, Nominal Supply Current=1.7µA, Address Bus Width=32b, Core Architecture="ARM Cortex-M4", Data Bus Width=32b, Flash Memory Size=1MB, Height=1.45mm, Interface="CAN, Ethernet, I2C, I2S, IrDA, LIN, SPI, UART, USART, USB", Lead Free="Lead Free", Length=14.2mm, Lifecycle Status=Production, Max Frequency=168MHz, Max Operating Temperature=85°C, Memory Size=1MB, Memory Type=FLASH, NexarPartId=20570110, Number of A/D Converters=3, Number of ADC Channels=16, Number of Channels=16, Number of D/A Converters=2, Number of Ethernet Channels=1, Number of I2C Channels=3, Number of I/Os=82, Number of Pins=100, Number of Programmable I/O=82, Number of PWM Channels=2, Number of SPI Channels=3, Number of Timers/Counters=14, Number of UART Channels=2, Number of USART Channels=4, Number of USB Channels=1, Oscillator Type=Internal, Peripherals="Brown-out Detect/Reset, DMA, I2C, LCD, POR, PWM, WDT", Radiation Hardening=No, RAM Size=192kB, REACH SVHC="No SVHC", RoHS=Compliant, Schedule B="8542310000, 8542310000", Watchdog Timer=Yes, Width=14.2mm
U2: library part CMP-04918-000406-1, "IC REG BUCK ADJ 1A TSOT23-6", Case/Package=SOT-23-6, Max Input Voltage=17V, Max Operating Temperature=85°C, Max Output Voltage=7V, Min Input Voltage=4.5V, Min Operating Temperature=-40°C, Min Output Voltage=760mV, Output Current=1A, Switching Frequency=580kHz, Mount="Surface Mount", Number Of Outputs=1, Output Configuration=Positive, Output Type=Adjustable, Packaging="Cut Tape", RoHS Compliant=Yes, Synchronous Rectifier=Yes
U3: library part CMP-04918-000439-1, "IC REG BUCK ADJ 2A TSOT23-6", Case/Package=SOT-23-6, Max Input Voltage=28V, Max Operating Temperature=125°C, Min Input Voltage=4.5V, Min Operating Temperature=-40°C, Min Output Voltage=596mV, Output Current=2A, Quiescent Current=40uA, Switching Frequency=500kHz, Lead Free="Lead Free", Max Output Voltage=28V, Mount="Surface Mount", Number Of Outputs=1, Output Configuration=Positive, Output Type=Adjustable, Packaging="Tape and Reel", RoHS Compliant=Yes, Synchronous Rectifier=Yes
U4: "4.5-V to 28-V Input, 3-A output, synchronous 350-kHz FCCM step-down converter 6-SOT-23-THIN -40 to 125", Manufacturer_Name="Texas Instruments", Copyright="Copyright (C) 2025 Ultra Librarian. All rights reserved.", Manufacturer_Part_Number=TPS54308DDCR, RefDes=RefDes, Type=TYPE

## Free pads (board coordinates)
  round 260 hole 130: 1(1185,4820) 1(1195,1210) 1(4115,4825) 1(4120,1205)

## Via types
v1: diameter 50, hole 28, Top Layer to Bottom Layer, 93 vias

## Nets (pads, with @x,y where several pads share a name; then routed paths per layer and width w, separated by ;. In a path a pad name is that pad's centre, name@x,y a point inside that pad or via, vN(x,y) a via of type N, cw(c..) or ccw(c..) an arc to the next point about the centre after c; other vN are vias at no path point)
3.3V: C1.1 C2.1 C3.1 C4.1 C5.1 C6.1 C18.1 FB1.1 J2.1 L1.2 R2.1 R4.2 R5.1 U1.11 U1.19 U1.28 U1.50 U1.75 U1.100 | length 1914.6
  Top Layer w10: FB1.1 1860,4127.44 1860,4052.56 v1(1862.56,4050) ; v1(1900,4440) 2004.84,4440 R4.2@2009.84,4445 ; v1(2185,4645) 2273.66,4645 R2.1 ; v1(2190,4515) 2195,4520 2415,4520 2431.42,4503.58 C3.1 2431.42,4459.44 2445.12,4445.74 2459.26,4445.74 2480.63,4424.37 U1.11 ; v1(2270,4245) 2270,4255.82 2291.8,4277.62 2291.8,4295.97 2305.87,4310.04 C4.1@2345,4310.04 ; C4.1 2347.7,4314.12 2347.7,4339.26 2365.08,4356.64 2413.36,4356.64 2503.11,4266.89 U1.19 ; R5.1 R5.1@2408.75,3632.62 ; v1@2486.42,4788.58 C6.1 2605,4709.06 2603.78,4707.83 U1.100 ; v1@2538.27,3998.27 2643.15,3998.27 U1.28 ; U1.50 3076.22,4043.78 3090.74,4029.26 3090.74,4015.12 3104.44,4001.42 C2.1 3118.58,4010 v1(3200,4010) ; U1.75 3146.02,4620.31 3173.83,4620.31 3174.14,4620 3184.14,4620 3190,4625.86 3190,4665 3200,4675 C5.1 v1@3233.58,4758.58
  other v1: 2650.24,3595.24 2550,3995 3235,4760 2495,4790
5V@2A: 5V@2A.1 C21.1 C22.1 L2.2 R7.1
  other v1: 3085,1235 3085,1340 3895,2220 3895,2415 3285,2880 3385,2880
5V@3A: 5V@3A.1 C25.1 L3.1 R9.2 | length 15.6
  Top Layer w45: C25.1@1833.98,1832.38 C25.1
  other v1: 2045,1240 2045,1320 2105,1830 2004.85,1830.66 2085,2155 2085,2270
12V: C16.1 C17.1 C20.1 C24.1 J4.1 U2.3 U2.5 U3.3 U4.3 | length 26
  Top Layer w12: C16.1@1600,3590 C16.1 ; C17.1@1737.93,3580 C17.1
  Top Layer w32: C20.1 C20.1@3276.3,2280
  other v1: 1085,1795 1080,1885 2995,2255 3095,2255 1749.39,3685.26 1610.25,3686.9 1210,4485 1380,4485
GND: 5V@2A.2 5V@3A.2 C1.2 C2.2 C3.2 C4.2 C5.2 C6.2 C7.2 C8.2 C9.1 C10.1 C11.2 C12.2 C13.2 C14.2 C16.2 C17.2 C18.2 C20.2 C22.2 C24.2 C25.2 J1.2 J1.3 J1.4 J1.5 J2.3 J2.5 J3.3 J4.2 R3.2 R6.2 R8.2 R10.1 U1.10 U1.20 U1.27 U1.74 U1.99 U2.1 U3.1 U4.1 | length 318
  Top Layer w22: U4.1@1359.19,1890.61 U4.1
  Bottom Layer w12: J1.5 3530,4881.77 v1(3530,4725) ; v1(3880,4725) 3880,4881.77 J1.4
  other v1: 1480,1420 1845,1635 1515,1645 2365,1660 3665,1675 4220,1680 1155,1685 2920,1825 1345,1975 1460,1975 2460,2000 3575,2070 4155,2345 3160,2375 3500,2420 3615,2420 1075,2465 4180,2920 1075,2970 1885,3085 2905,3090 4180,3160 2390,3285 1610,3400 1740,3400 3355,3425 1990,3435 2655,3485 1075,3505 4060,3700 2215,3830 2360,3830 2550,3900 3205,3935 2905,3980 1785,4050 4060,4130 2280,4140 2115,4180 2435,4260 2020,4340 4210,4400 3375,4585 3380,4675 2455,4690 2855,4880 2495,4890 1895,4915 2255,4920
NetC7_1: C7.1 C8.1 R1.2 U1.21 | length 658.8
  Top Layer w10: R1.2@2025.92,4130 2100,4130 2161.93,4068.07 2215,4068.07 2354.09,4068.07 2355,4067.17 2357.17,4065 2415,4065 2460,4110 2460,4205 2481.61,4226.61 2533.98,4226.61 U1.21
NetC9_2: C9.2 C10.2 FB1.2 R1.1 U1.22 | length 907.9
  Top Layer w10: FB1.2 R1.1 1971.54,4058.46 2050,3980 C10.2 2353.58,3980 C9.2 2411.42,3986.42 2425,4000 2425,4050 2475,4100 2475,4198.79 2484.05,4207.83 U1.22
NetC11_1: C11.1 J2.6 R4.1 U1.14 | length 3510.5
  Top Layer w10: R4.1 2160,4445 2205,4400 2275,4400 ; C11.1@2176.42,4345 2215,4345 2270,4400 2275,4400 ; v1(2180,4243.95) 2180,4245 2335,4400 ; U1.14 2434.68,4365.31 2400,4400 2335,4400 ; v1(3830,3975) 3935,4080 4020,4080 J2.6@4085,4015 ; 2275,4400 2335,4400
  Bottom Layer w10: v1(2180,4243.95) 2172.35,4236.3 2096.3,4236.3 2045,4185 2045,3920 2200,3765 3620,3765 v1(3830,3975)
NetC12_1: C12.1 R2.2 U1.6 | length 283.9
  Top Layer w10: R2.2 2366.5,4563.66 C12.1 2417.83,4572.17 2467.2,4522.8 U1.6
NetC13_1: C13.1 U1.73 | length 88.2
  Top Layer w10: U1.73 3188.54,4581.85 3195.39,4575 C13.1
NetC14_1: C14.1 U1.49 | length 129.2
  Top Layer w10: C14.1 3000,4029.14 3005.86,4035 3049.78,4035 3056.92,4042.14 U1.49@3056.92,4079.5
NetC15_1: C15.1 U2.6 | length 688.7
  Top Layer w12: v1(1870,3440) 1870,3508.17 1877.03,3515.2 U2.6 ; v1(2145,3435) 2220,3510 2220,3552.97 2207.97,3565 C15.1
  Bottom Layer w12: v1(1870,3440) 1873,3437 1873,3397 1915,3355 2075,3355 2145,3425 v1(2145,3435)
NetC15_2: C15.2 L1.1 U2.2 | length 26.5
  Top Layer w12: C15.2@2097.6,3552.6 C15.2 C15.2@2103.66,3571.34
NetC19_1: C19.1 U3.6 | length 399.8
  Top Layer w10: C19.1 3620,2535 v1@3624.73,2530.27 ; U3.6 3637.4,2327.4
  Top Layer w12: 3637.4,2327.4 3645,2335 v1(3690,2335)
  Bottom Layer w12: v1(3635,2530) 3690,2475 v1(3690,2335)
NetC19_2: C19.2 L2.1 U3.2
NetC21_2: C21.2 R7.2 R8.1 U3.4 | length 421.6
  Top Layer w10: U3.4 3667.6,2252.6 3695.94,2280.94 3775,2280.94 3775,2213.39 R7.2 ; R8.1@3662.99,2168.39 R8.1 ; R8.1@3680,2151.37 R8.1 ; R7.2@3775,2208.39 R7.2 ; R8.1 3717.01,2208.39 R7.2
NetC23_1: C23.1 U4.6 | length 358.4
  Top Layer w10: C23.1 v1(1475,2070) ; U4.6 1470.87,1892.4 1542.4,1892.4 v1(1545,1895)
  Bottom Layer w10: v1(1475,2070) 1485,2070 1550,2005 1550,1900 v1(1545,1895)
NetC23_2: C23.2 L3.2 U4.2
NetJ1_1: J1.1 U1.67 | length 905.1
  Top Layer w10: U1.67 3578.74,4463.74 3705,4590 J1.1
NetR3_1: R3.1 U1.94 | length 111.5
  Top Layer w10: U1.94 2721.89,4726.89 2750,4755 R3.1
NetR5_2: R5.2 R6.1 U2.4 | length 801
  Top Layer w12: U2.4 1872.03,3590 1865,3597.03 1865,3620 1905,3660 v1(1915,3660) ; v1(2275,3545) 2285.28,3545 2310.28,3570 2388.63,3570 R5.2 R6.1
  Bottom Layer w12: v1(1915,3660) 2020,3660 2060,3620 2245,3620 2275,3590 v1(2275,3545)
NetR9_1: R9.1 R10.2 U4.4 | length 358.6
  Top Layer w10: U4.4@1470,1815 1505,1815 1530,1790 1530,1765 1556.09,1738.91 1587.3,1738.91 R9.1 1663.39,1746.61 1697.74,1712.26 R10.2
RX: J3.2 U1.56 | length 1581
  Top Layer w10: U1.56 3192.8,4247.2 3870,3570 4239.14,3570 4245,3564.14 4245,3465 J3.2
SWDCLK: J2.4 U1.76 | length 1717.1
  Top Layer w10: v1(3075,4775) 3075.61,4774.39 3075.61,4690.73 U1.76
  Bottom Layer w10: v1(3075,4775) 3145,4775 3190,4820 3294.5,4820 3460,4654.5 3460,4335 3735,4060 3860,4060 3910,4010 3910,3940 3935,3915 J2.4@4085,3915
SWDIO: J2.2 U1.72 | length 1372.4
  Top Layer w10: U1.72 3187.01,4562.17 3239.18,4510 v1(3310,4510)
  Bottom Layer w10: v1(3310,4510) 3310,4435 3720,4025 3860,4025 3880,4005 3880,3870 3935,3815 J2.2@4085,3815
TX: J3.1 U1.55 | length 1333.3
  Top Layer w10: U1.55 3146.02,4226.61 3178.39,4226.61 3910,3495 J3.1
pads on no net: 5V@2A.3 5V@3A.3 J4.3 U1.1 U1.2 U1.3 U1.4 U1.5 U1.7 U1.8 U1.9 U1.12 U1.13 U1.15 U1.16 U1.17 U1.18 U1.23 U1.24 U1.25 U1.26 U1.29 U1.30 U1.31 U1.32 U1.33 U1.34 U1.35 U1.36 U1.37 U1.38 U1.39 U1.40 U1.41 U1.42 U1.43 U1.44 U1.45 U1.46 U1.47 U1.48 U1.51 U1.52 U1.53 U1.54 U1.57 U1.58 U1.59 U1.60 U1.61 U1.62 U1.63 U1.64 U1.65 U1.66 U1.68 U1.69 U1.70 U1.71 U1.77 U1.78 U1.79 U1.80 U1.81 U1.82 U1.83 U1.84 U1.85 U1.86 U1.87 U1.88 U1.89 U1.90 U1.91 U1.92 U1.93 U1.95 U1.96 U1.97 U1.98 U3.5 U4.5

## Polygon pours and split planes (outlines as drawn)
12V on Bottom Layer "12V_L04_P050" (solid, pour order 50): 1810,3735 1810,3555 1505,3555 1505,3735
12V on Bottom Layer "12V_L04_P021" (solid, pour order 21): 1025,4580 1690,4580 1690,3845 1425,3580 1025,3580 1025,4460
12V on Bottom Layer "12V_L04_P003" (solid, pour order 3): 1140,1750 1025,1750 1025,3735 1505,3735 1505,3555 1330,3380 1330,2645 2775,2645 3115,2305 3152.55,2305 3168.61,2207.97 2360.78,2199.22 2125,2435 1140,2435 1140,2255
5V@3A on Bottom Layer "5V@3A_L04_P047" (solid, pour order 47): 1925,2325 1925,1875 2285,1875 2205,1955 2205,2325
5V@3A on Bottom Layer "5V@3A_L04_P025" (solid, pour order 25): 1925,1895 1925,1145 1940,1130 2285,1130 2285,1895
5V@2A on Bottom Layer "5V@2A_L04_P041" (solid, pour order 41): 3815,2362.5 3815,2470 3570,2715 3550,2695 3125,2695 3125,2855 3195,2925 3935,2925 4015,2845 4015,2367.5
5V@2A on Bottom Layer "5V@2A_L04_P029" (solid, pour order 29): 3810,2375 4015,2375 4020,2370 4020,1925 3450,1925 3385,1860 3395,1850 3395,1080 3080,1080 3075,1075 3040,1110 3040,1965 3100,2025 3520,2025 3545,2000 3805,2000 3810,2005
NetC23_2 on Top Layer "NETC23_2_L01_P004" (solid, pour order 4): 1380,1865 1380,1840 1255,1840 1255,2130 1440,2315 1600,2315 1600,2120 1380,2120 1380,2110 1380,2040 1370,2040 1365,2035 1280,2035 1280,1880 1295,1865 1350,1865
12V on Top Layer "12V_L01_P012" (solid, pour order 12): 1530,3555 1810,3555 1825,3540 1935,3540 1935,3565 1850,3565 1850,3655 1895,3700 1975,3700 1995,3680 1995,3580 2050,3580 2050,3735 1530,3735
GND on Top Layer "GND_L01_P049" (solid, pour order 49): 2875,2185 2875,2335 3105,2335 3110,2330 3110,2390 2790,2710 2765,2685 1360,2685 1360,3375 1480,3495 1480,3755 1880,3755 1880,3885 1480,3885 1430,3835 1430,3730 1040,3730 1025,3715 1025,1965 1145,1965 1145,2450 2120,2450 2200,2370 2200,2178.45
5V@3A on Top Layer "5V@3A_L01_P048" (solid, pour order 48): 2180,1935 2180,1775 2170,1785 1555,1785 1555,1855 1550,1860 1575,1860 1645,1930
5V@3A on Top Layer "5V@3A_L01_P046" (solid, pour order 46): 1905,2350 1905,2090 2130,2090 2130,2325 2105,2350
GND on Top Layer "GND_L01_P044" (solid, pour order 44): 2220,2000 1505,2000 1505,1930 1520,1945 2220,1945
GND on Top Layer "GND_L01_P043" (solid, pour order 43): 3660,2367.5 3752.5,2460 4025,2460 4045,2480 4045,2941.49 3516.49,2941.49 3495,2920 3495,2680 3550,2680 3680,2550 3680,2470 3641.87,2470
5V@2A on Top Layer "5V@2A_L01_P042" (solid, pour order 42): 3145,2925 3115,2895 3120,2890 3120,2690 3475,2690 3475,2925
NetC19_2 on Top Layer "NETC19_2_L01_P040" (solid, pour order 40): 3535,2305 3535,2275 3395,2275 3395,2285 3355,2325 3345,2325 3345,2435 3330,2450 3165,2450 3135,2480 3135,2600 3510,2600 3515,2595 3515,2480 3460,2480 3455,2485 3440,2470 3430,2470 3415,2455 3420,2450 3420,2310 3440,2310 3450,2300 3455,2305
GND on Top Layer "GND_L01_P039" (solid, pour order 39): 2815,2645 3110,2350 3110,2451.78 3118.59,2460.37 2933.96,2645
5V@2A on Top Layer "5V@2A_L01_P028" (solid, pour order 28): 3815,2465 3810,2460 3810,2160 3740,2160 3730,2150 3730,2105 4015,2105 4010,2110 4015,2115 4015,2465
GND on Top Layer "GND_L01_P038" (solid, pour order 38): 3328.74,2347.04 3311.7,2330 3110,2330 3110,2465
GND on Top Layer "GND_L01_P030" (solid, pour order 30): 4045,2941.49 4045,2410 4025,2390 4030,2385 4030,2090 3990,2050 3720,2050 3720,2090 3720,2105 3630,2105 3550,2185 2200,2185 2200,1755 2625,1755 2625,1550 3415,1550 3435,1530 4270,1530 4265,1535 4265,2941.49
GND on Top Layer "GND_L01_P000" (solid, pour order 0): 1810,3520 1495,3520 1350,3375 1350,2670 2773.13,2670 3328.74,2328.85 3328.74,2425 3070,2425 3070,2940 4265,2940 4265,4975 1720,4975 1720,4430 1820,4330 1820,3775 2705,3775 2735,3745 2730,3740 2730,3525 2725,3530 2470,3530 2470,3430 2450,3410 2205,3410 2115,3320 1870,3320 1810,3380
GND on Top Layer "GND_L01_P011" (solid, pour order 11): 3660,2436.54 3660,2367.5 3540,2367.5 3535,2362.5 3535,2312.5 3450,2312.5 3435,2327.5 3435,2442.5 3462.5,2470 3641.87,2470
GND on Top Layer "GND_L01_P002" (solid, pour order 2): 1415,2020 1299.89,2020 1299.89,1875 1379.89,1875 1379.89,1905 1415,1940.11
GND on Top Layer "GND_L01_P034" (solid, pour order 34): 1415,2020 1515,2020 1515,1925 1512.55,1922.55 1397.45,1922.55
12V on Top Layer "12V_L01_P033" (solid, pour order 33): 3280,2310 2899.44,2310 2899.44,2210 3489.44,2210 3494.44,2215
12V on Top Layer "12V_L01_P032" (solid, pour order 32): 1140,1821.2 1140,1930 1025,1930 1025,1818.7
GND on Top Layer "GND_L01_P031" (solid, pour order 31): 2085,3385 2185,3385 2110,3310 1860,3310 1790,3380 1795,3385 1900,3385 1920,3405 1920,3480 1925,3485 2085,3485
GND on Top Layer "GND_L01_P027" (solid, pour order 27): 1980.19,1760 2625,1760 2625,1550 1865,1550
5V@3A on Top Layer "5V@3A_L01_P026" (solid, pour order 26): 2310,1450 2310,1130 1990,1130 1990,1450
GND on Top Layer "GND_L01_P024" (solid, pour order 24): 1989.25,1760 1390,1760 1360,1730 1025,1730 1025,1365 1030,1360 1819.25,1360
5V@2A on Top Layer "5V@2A_L01_P019" (solid, pour order 19): 3380,1460 3035,1460 3035,1095 3150,1095 3380,1095
GND on Top Layer "GND_L01_P023" (solid, pour order 23): 1720,4830 1720,4180 1535,4180 1535,3950 1540,3945 1920.72,3945
12V on Top Layer "12V_L01_P022" (solid, pour order 22): 1130,4555 1130,4210 1455,4210 1455,4555
GND on Top Layer "GND_L01_P020" (solid, pour order 20): 3883.02,1915 3480,1915 3435,1860 3435,1850 3435,1530 3635,1530 3635,1820 3838.07,1820 3872.17,1854.1
3.3V on Top Layer "3.3V_L01_P016" (solid, pour order 16): 2170,3745 2170,3735 2170,3620 2450,3620 2470,3600 2470,3555 2605,3555 2620,3540 2710,3540 2710,3745 2705,3750
GND on Top Layer "GND_L01_P014" (solid, pour order 14): 1995,3525 2055,3525 2085,3495 2085,3460 2015,3390 1945,3390 1940,3395 1940,3485 1995,3485
NetC15_2 on Top Layer "NETC15_2_L01_P013" (solid, pour order 13): 1995,3570 2060,3570 2060,3740 2120,3740 2135,3725 2135,3590 2135,3500 2095,3500 2055,3540 1995,3540
12V on Top Layer "12V_L01_P007" (solid, pour order 7): 3224.44,2305 3355,2305 3400,2260 3405,2265 3530,2265 3530,2210 3355.73,2210
12V on Top Layer "12V_L01_P005" (solid, pour order 5): 1380,1830 1380,1770 1360,1750 1025,1750 1025,1825 1025,1830
3.3V on Power Plane (split plane): 4274.9,1020.1 1020.1,1020.1 1020.1,4979.9 4274.9,4979.9
GND on GND Plane (split plane): 4274.9,1020.1 1020.1,1020.1 1020.1,4979.9 4274.9,4979.9

## Silkscreen, mask and mechanical layers (free items; w line width, h text height)
Top Overlay:
  text "RST SWDIO SWDCLK" at 3965,4065 h20 r270
  text "GND GND 3.3" at 4245,4060 h20 r270
  text "TX RX GND" at 4065,3470 h20 r270
Mechanical 1:
  lines w10: 1000,1005 1000,5000 4295,5000 4295,1000 1005,1000 1000,1005